# Altium PCB LDO.PcbDoc
Units mm, origin at the board's own origin, x right, y up, seen from the top; angles counter-clockwise.
Board outline 29 x 12 mm, 2 copper layers (Top Layer, Bottom Layer); 5 components, 3 nets, 17 pads, 5 vias.
Unrouted connection lines stored in the file: 4.
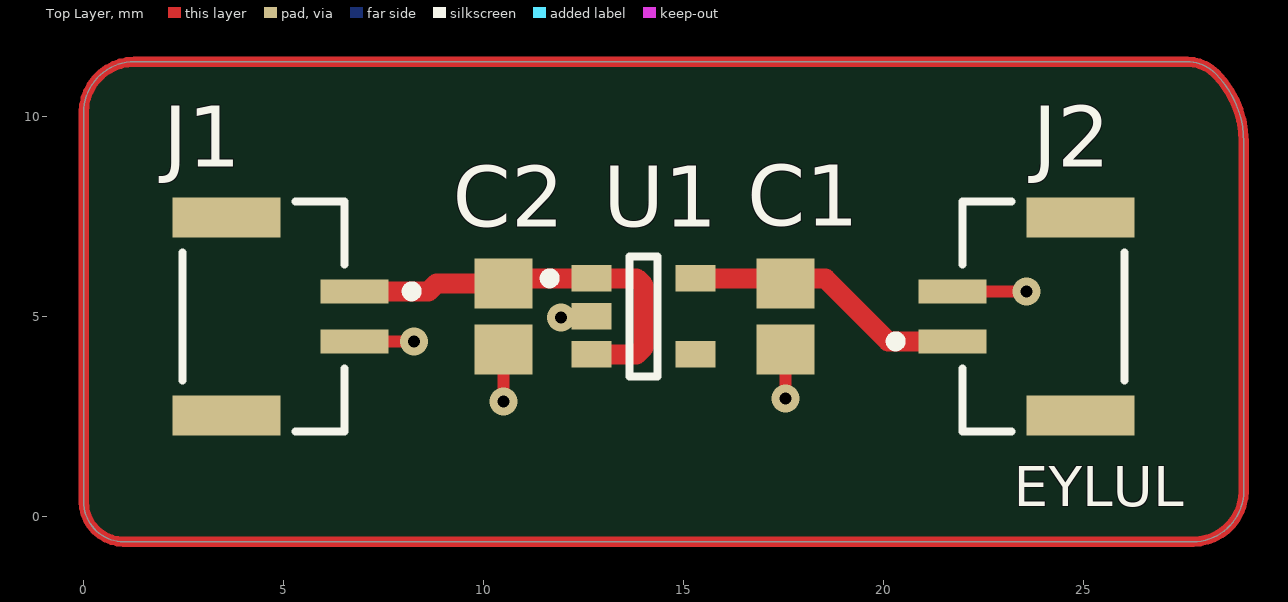
[diagram p0: Top Layer view]
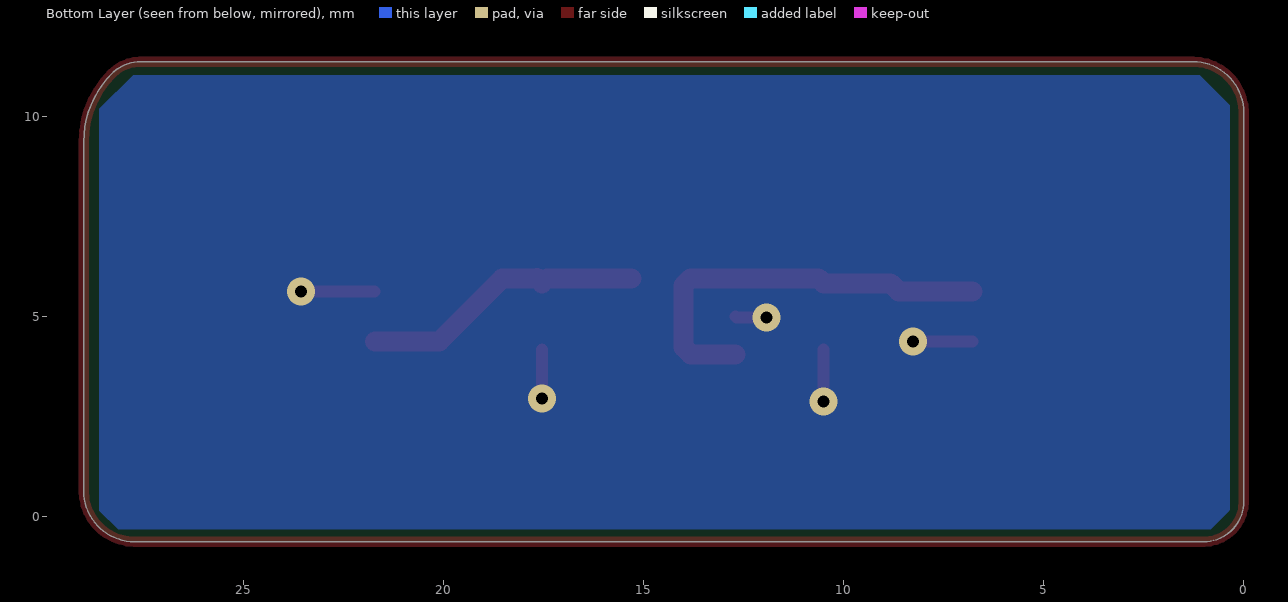
[diagram p1: Bottom Layer view, seen from below]
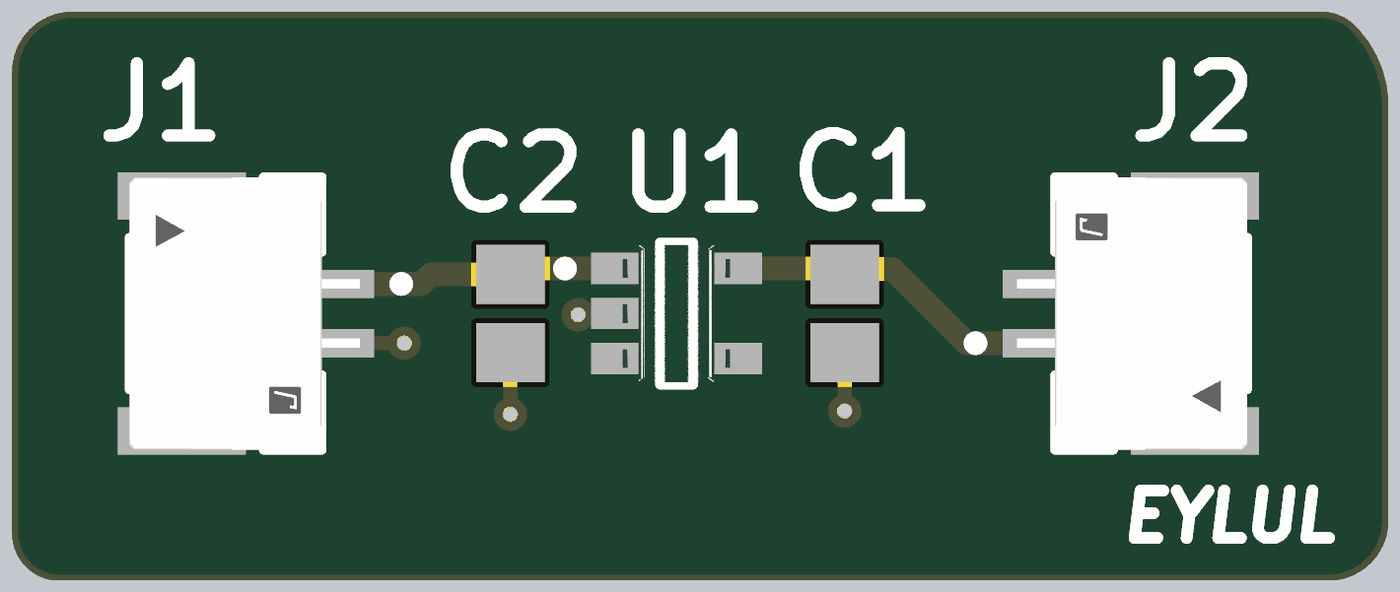
[diagram p2: 3D render of the assembled board from above, using the file's embedded part models]

## Layer stack, top to bottom
Top Solder: solder mask 0.0102, Solder Resist, Dk 3.5
Top Layer: signal copper 0.0356
Dielectric 1: dielectric 0.32, FR-4, Dk 4.8
Bottom Layer: signal copper 0.0356
Bottom Solder: solder mask 0.0102, Solder Resist, Dk 3.5

## Board outline
0,0.365 ccw(c1,0.365) 1,-0.635 27.73,-0.635 ccw(c27.73,0.635) 29,0.635 29,9.365 ccw(c26.586,9.365) 28.293,11.072 ccw(c27.586,10.365) 27.586,11.365 1.27,11.365 ccw(c1.27,10.095) 0,10.095

## Design rules (kind name [scope] priority, off if disabled: settings)
Clearance [All] p1: gap=0.254 ignorepadtopadclearanceinfootprint=FALSE
PolygonConnect [All] p1: connectstyle=Relief reliefconductorwidth=0.254 reliefentries=4 polygonreliefangle="90 Angle" airgapwidth=0.254
RoutingVias [All] p1: holewidth=0.711 width=1.27 viastyle="Through Hole" minholewidth=0.711 minwidth=1.27 maxholewidth=0.711 maxwidth=1.27
SolderMaskExpansion [All] p1: expansion=0.102 istentingtop=FALSE
SupplyNets "Schematic Supply Nets_2" [InNet('+5V')] p1: voltage=0.000
SupplyNets "Schematic Supply Nets_1" [InNet('GND')] p2: voltage=0.000
SupplyNets "Schematic Supply Nets" [InNet('+3.3V')] p3: voltage=0.000
Width [All] p1: maxlimit=0.5 minlimit=0.254 preferedwidth=0.3
30 further rules are at their usual default settings.

## Components (designator, comment, footprint, x,y, rotation, side; value= is the part's Value field where it differs from the comment)
C1 "VJ0805Y105KXQRW1BC" CAPC2013X145X50NL20T20 17.543,5 r90 top
C2 "VJ0805Y105KXQRW1BC" CAPC2013X145X50NL20T20 10.5,5 r270 top
J1 "SM02B-GHS-TB(LF)(SN)" FP-SM02B-GHS-TB_LF_SN-MFG 4.5,5 r270 top
J2 "SM02B-GHS-TB(LF)(SN)" FP-SM02B-GHS-TB_LF_SN-MFG 24,5 r90 top
U1 "MIC5235YM5-TR" FP-SOT23-5LD-PL-1-MFG 14,5 r0 top

## Footprints (in the part's own frame and the unit in brackets; to place one, negate y for a bottom-side part, rotate by r counter-clockwise, add the part's x,y. Pads: shape width x height; smd on the part's side, far side on the other; paste and mask are expansions set on the pad)
CAPC2013X145X50NL20T20 [mm] "Chip Capacitor, 2-Leads, Body 2.00x1.25mm, IPC Medium Density"
  rect 1.25x1.45 smd: 1(-0.825,0) 2(0.825,0)
  body extent -1.1,-0.72 1.1,0.72, height 1.45
FP-SM02B-GHS-TB_LF_SN-MFG [mm]
  rect 0.6x1.7 smd paste+0 mask+0: 1(-0.625,2.275) 2(0.625,2.275)
  rect 1x2.7 smd paste+0 mask+0: 3(-2.475,-0.925) 4(2.475,-0.925)
  silkscreen extent -2.88,-2.02 2.88,3.83, body extent -3.08,-2.37 3.08,3.22, height 0.25
FP-SOT23-5LD-PL-1-MFG [mm]
  rect 1x0.66 smd paste+0 mask+0: 1(-1.3,0.95) 2(-1.3,0) 3(-1.3,-0.95) 4(1.3,-0.95) 5(1.3,0.95)
  silkscreen extent -2.47,-1.5 0.35,1.5, body extent -1.9,-1.6 1.9,1.6, height 0.25

## Part data
C1 C2: library part CMP-2007-01676-1, Manufacturer=Vitramon, Part Number=VJ0805Y105KXQRW1BC
J1 J2: library part CMP-2000-07076-2, "CONN HEADER SMD R/A 2POS 1.25MM", Color=Natural, Current Rating=1A, Package Quantity=2500, Voltage Rating=50V, Connector Type="Outer Shroud Contact", Contact Material=Bronze, Contact Plating=Tin, Contact Type="Male Pin", Fastening Type=Latch, Housing Color=Natural, Housing Material=Nylon, Lead Free="Lead Free", Mount="Surface Mount", Number of Contacts=2, Number of Positions=2, Number of Rows=1, Orientation="Right Angle", Packaging="Tape and Reel", Pitch=0.049inch, Series=GH, Termination=Solder
U1: library part CMP-06324-000004-1, "IC REG LIN POS ADJ 150MA SOT23-5", Dropout Voltage=310mV, Manufacturer="Microchip Technology", Max Junction Temp=+125°C, Max Supply Voltage=24V, Min Supply Voltage=2.3V, Nominal Supply Current=18-2000uA, Output Current=150mA, Output Voltage=1.24-20V, Package=SOT23-5LD-PL-1, Temperature="-40°C to +125°C", Temperature Range Low=-40°C, Accuracy Percentage=1%, Automotive=No, Category=IC, ComponentLink2Description=Datasheet, ComponentLink2URL=http://ww1.microchip.com/downloads/en/DeviceDoc/mic5235.pdf, Device Class L1="Integrated Circuits (ICs)", Device Class L2="Power Management ICs", Device Class L3="Voltage Regulators - Linear", Digikey Description="IC REG LIN POS ADJ 150MA SOT23-5", Height=1.45mm, Lead Free=Yes, Manufacturer Part Number=MIC5235YM5-TR, Mouser Description="Low Dropout Regulators - LDO High Vin, Low Iq Regulator (Lead Free)", Number Of Outputs=1, Octopart=https://octopart.com/mic5235ym5-tr-microchip-66802314, Output Type=AdjustableProgrammable, RoHS=TRUE, Standoff Height=0mm, Temperature Range High=+125°C, Ipc Land Pattern Name=SOT95P280X118-5

## Via types
v1: diameter 0.7, hole 0.3, Top Layer to Bottom Layer, tented both sides, 5 vias

## Nets (pads, with @x,y where several pads share a name; then routed paths per layer and width w, separated by ;. In a path a pad name is that pad's centre, name@x,y a point inside that pad or via, vN(x,y) a via of type N, cw(c..) or ccw(c..) an arc to the next point about the centre after c; other vN are vias at no path point)
+3.3V: C1.2 J2.1 U1.5 | length 7
  Top Layer w0.5: U1.5 C1.2@17.418,5.95 ; C1.2 17.672,5.954 17.686,5.94 18.543,5.94 20.11,4.373 J2.1@21.723,4.373
+5V: C2.1 J1.1 U1.1 U1.3 | length 10.4
  Top Layer w0.5: J1.1 8.625,5.625 8.825,5.825 C2.1 10.625,5.95 U1.1 13.824,5.95 14,5.774 14,4.226 13.824,4.05 U1.3
GND: C1.1 C2.2 J1.2 J2.2 U1.2 | length 6.7
  Top Layer w0.3: J1.2 v1(8.263,4.375) v1@8.267,4.371 ; v1(10.5,2.875) C2.2 ; v1(11.928,4.976) 12.676,4.976 U1.2 ; v1@17.54,2.94 v1(17.543,2.944) C1.1 ; J2.2 23.567,5.625 v1(23.569,5.623)
pads on no net: J1.3 J1.4 J2.3 J2.4 U1.4
copper on no net: | length 79.7
  Top Layer w0.254: 0,0.365 ccw(c1,0.365) 1,-0.635 27,-0.635 27.73,-0.635 ccw(c27.73,0.635) 29,0.635 29,9.365 ccw(c26.586,9.365) 28.293,11.072 ccw(c27.586,10.365) 27.586,11.365 1.27,11.365 ccw(c1.27,10.095) 0,10.095 0,0.365

## Polygon pours and split planes (outlines as drawn)
no net on Bottom Layer "NONET_L02_P001" (solid, pour order 1): 0.365,0.138 0.343,0.16 0.343,10.281 1.095,11.032 27.767,11.032 28.606,10.193 28.606,0.138 28.142,-0.326 0.829,-0.326 0.785,-0.282

## Silkscreen, mask and mechanical layers (free items; w line width, h text height)
Top Overlay:
  text "EYLUL" at 23.254,0.254 h1